# Altium PCB PCB copy2.pcbdoc
Units mm, origin at the board's own origin, x right, y up, seen from the top; angles counter-clockwise.
Board outline 151.68 x 185.92 mm, 2 copper layers (Top Layer, Bottom Layer); 79 components, 158 nets, 343 pads, 25 vias.
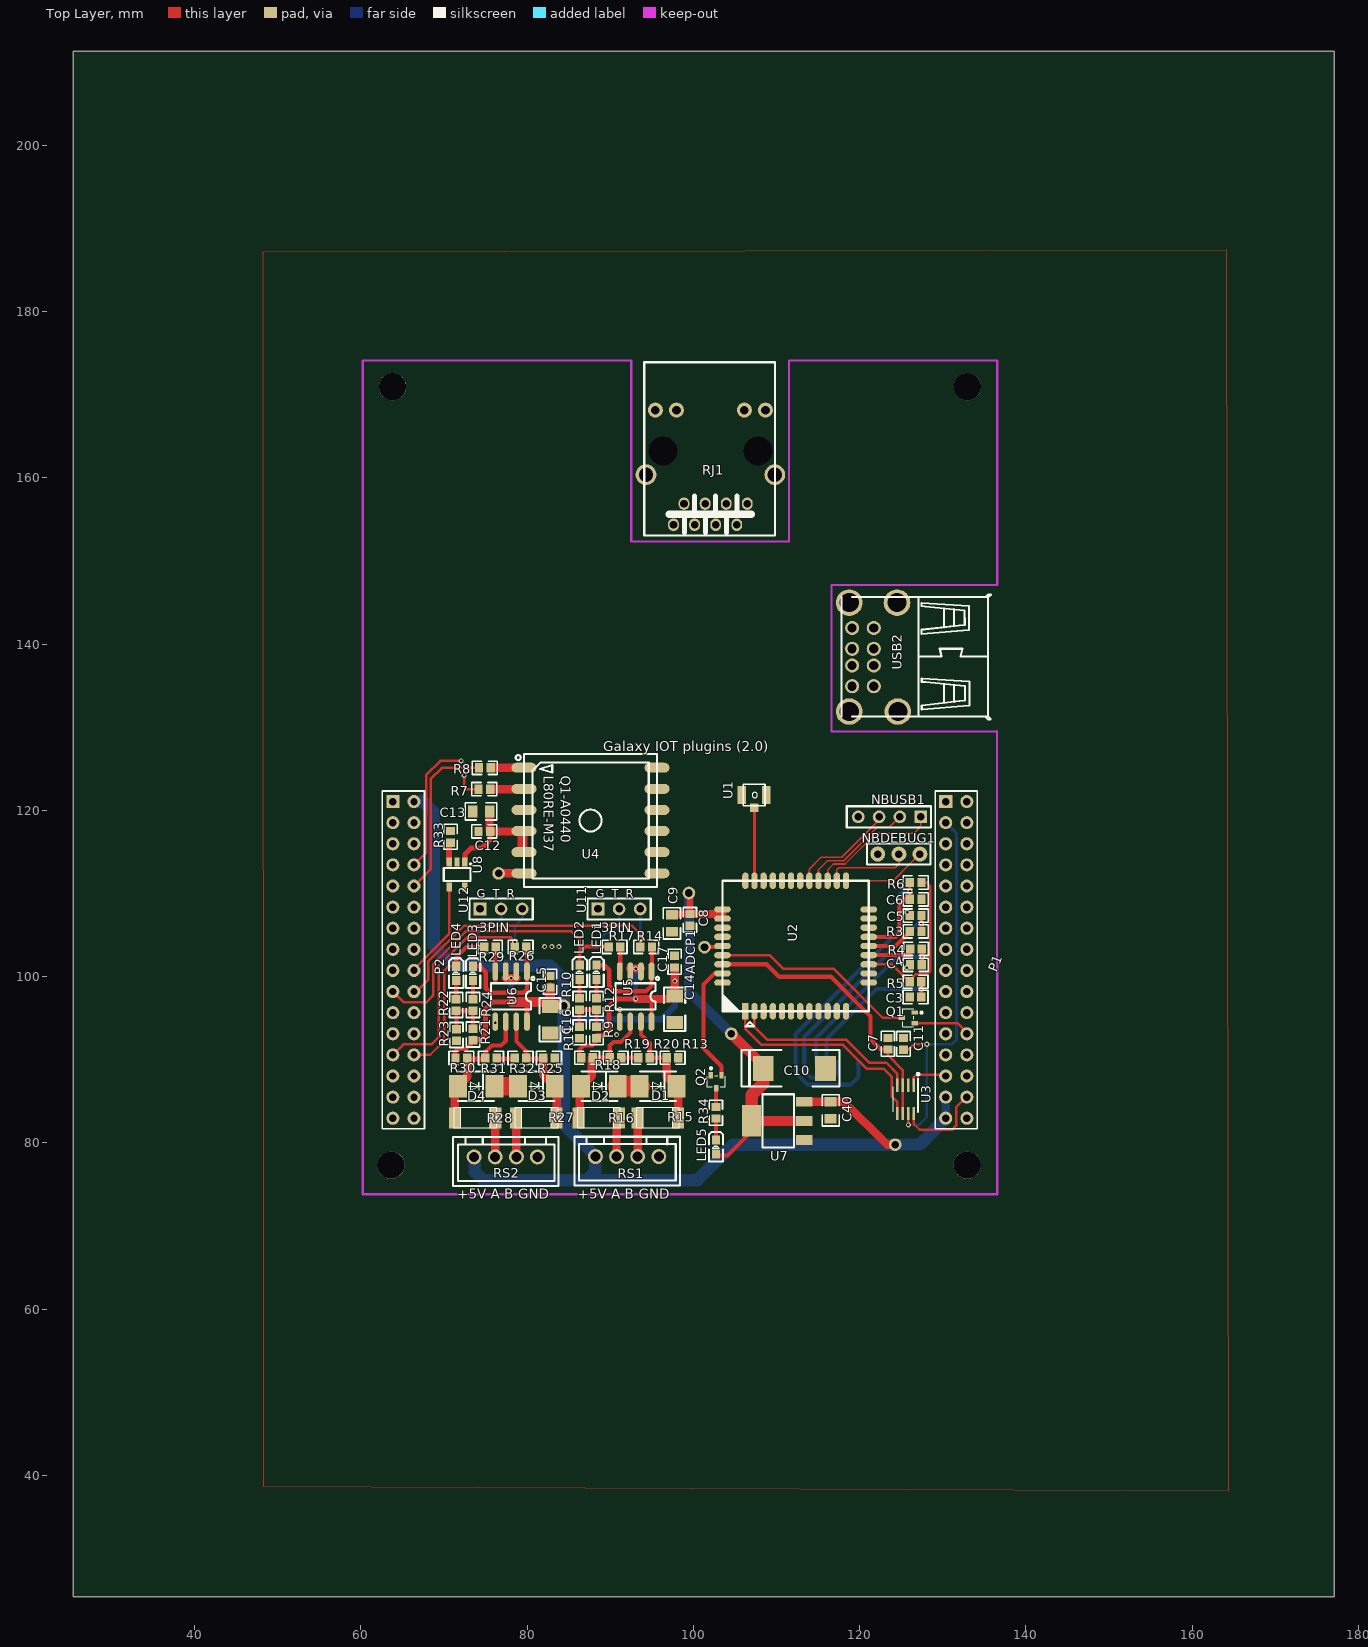
[diagram p0: Top Layer view]
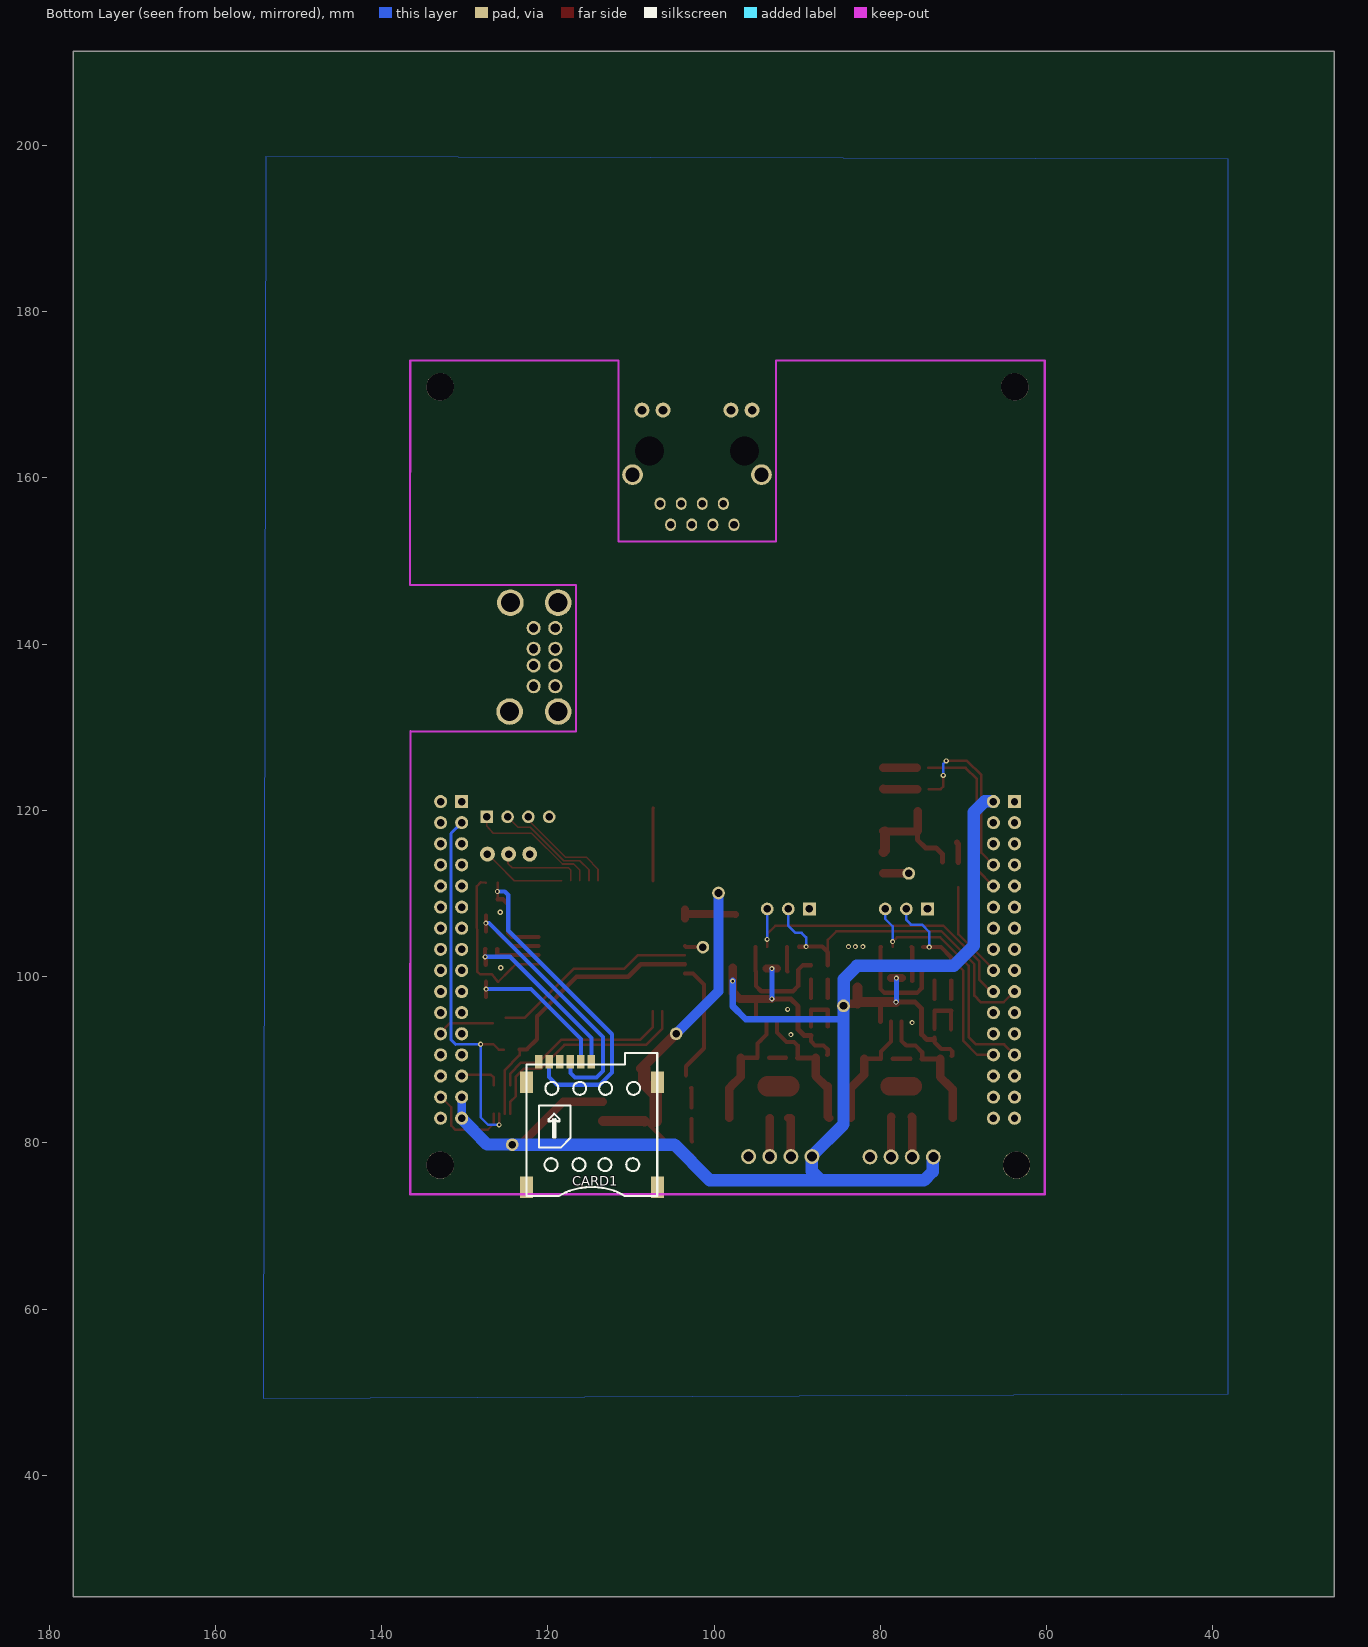
[diagram p1: Bottom Layer view, seen from below]

## Layer stack, top to bottom
Top Layer: signal copper (thickness not stored)
Dielectric: dielectric 0.32, FR-4, Dk 4.8
Bottom Layer: signal copper (thickness not stored)

## Board outline
177.08,25.4 25.4,25.4 25.4,211.32 177.08,211.32

## Components (designator, comment, footprint, x,y, rotation, side; value= is the part's Value field where it differs from the comment)
ADCP1 "1Pin" 1PIN 101.34,103.54 r0 top
C3 "33pF" 0603 126.72,97.54 r0 top
C4 "33pF" 0603 126.76,101.42 r0 top
C5 "33pF" 0603 126.74,107.34 r0 top
C6 "33pF" 0603 126.74,109.3 r180 top
C7 "100nF" 0603 123.4,91.92 r270 top
C8 "100nF" 0603 99.58,106.82 r90 top
C9 "1uF" 0805 97.42,106.42 r90 top
C10 "470uF" CASE-E_7343 112.16,88.94 r180 top
C11 "100nF" 0603 125.28,91.9 r270 top
C12 "100nF" 0603 74.841,117.467 r0 top
C13 "10uF" 0805 74.46,119.88 r0 top
C14 "10uF" 1206 97.745,96.076 r90 top
C15 "100nF" 0603 82.759,99.378 r270 top
C16 "10uF" 1206 82.759,94.806 r90 top
C17 "100nF" 0603 97.745,101.791 r270 top
C40 "10uF" 0805 116.52,83.92 r90 top
CARD1 "SIM-002-T6" 17.2MM*15.36MM*1.38MM 114.7,82.2 r0 bottom
D1 "SMBJ6.8CA" SMB(DO-214AA) 95.745,86.808 r0 top
D2 "SMBJ6.8CA" SMB(DO-214AA) 88.685,86.808 r0 top
D3 "SMBJ6.8CA" SMB(DO-214AA) 81.108,86.805 r0 top
D4 "SMBJ6.8CA" SMB(DO-214AA) 73.869,86.805 r0 top
LED1 "19-217/BHC-ZL1M2RY/3T" LED-0603 88.347,100.521 r270 top
LED2 "KT-0603R" LED-0603 86.315,100.521 r270 top
LED3 "19-217/BHC-ZL1M2RY/3T" LED-0603 73.488,100.394 r270 top
LED4 "KT-0603R" LED-0603 71.456,100.394 r270 top
LED5 "19-217/BHC-ZL1M2RY/3T" LED-0603 102.72,79.5 r270 top
NBDEBUG1 "3pin插针" 3PIN插针 127.26,114.74 r180 top
NBUSB1 "4PIN" 2.5-4PIN 127.34,119.22 r180 top
P1 "Header-Female-2.54_2x16" HDR-16X2/2.54 132.9,100.74 r270 top
P2 "Header-Female-2.54_2x16" HDR-16X2/2.54 66.38,100.74 r270 top
Q1 "DTC143XUAT106" SOT-323_3PIN_L2.10-W2.20-PITCH0.65-TR 125.84,95.04 r0 top
Q2 "DTC143XUAT106" SOT-323_3PIN_L2.10-W2.20-PITCH0.65-TR 102.74,87.36 r90 top
R3 "22" 0603 126.74,105.44 r0 top
R4 "22" 0603 126.78,103.34 r0 top
R5 "22" 0603 126.72,99.38 r0 top
R6 "10K" 0603 126.74,111.32 r0 top
R7 "100" 0603 74.841,122.547 r180 top
R8 "100" 0603 74.9,125.12 r180 top
R9 "470" 0603 88.347,93.282 r270 top
R10 "4.7K" 0603 86.315,96.711 r90 top
R11 "2K" 0603 86.315,93.282 r270 top
R12 "4.7K" 0603 88.347,96.711 r90 top
R13 "4.7K" 0603 97.491,90.234 r180 top
R14 "22" 0603 94.316,103.569 r0 top
R15 "10" 2010 95.713,82.995 r180 top
R16 "10" 2010 88.601,82.995 r0 top
R17 "22" 0603 90.506,103.569 r0 top
R18 "4.7K" 0603 87.204,90.234 r0 top
R19 "120" 0603 90.633,90.234 r180 top
R20 "NC" 0603 94.062,90.234 r0 top
R21 "470" 0603 73.488,93.028 r270 top
R22 "4.7K" 0603 71.456,96.584 r90 top
R23 "2K" 0603 71.485,92.968 r270 top
R24 "4.7K" 0603 73.488,96.584 r90 top
R25 "4.7K" 0603 82.626,90.208 r180 top
R26 "22" 0603 79.203,103.569 r0 top
R27 "10" 2010 81.108,82.995 r180 top
R28 "10" 2010 73.742,82.995 r0 top
R29 "22" 0603 75.52,103.569 r0 top
R30 "4.7K" 0603 72.085,90.208 r0 top
R31 "120" 0603 75.641,90.208 r180 top
R32 "NC" 0603 79.197,90.208 r0 top
R33 "10K" 0603 70.78,116.82 r270 top
R34 "470" 0603 102.7,83.62 r270 top
RJ1 "HR911105A" RJ45-LIGHT 102.045,161.265 r180 top
RS1 "A2501WV-04P2" A2501WV-4P 92.024,78.349 r180 top
RS2 "A2501WV-04P2" A2501WV-4P 77.425,78.308 r180 top
U1 "IPEX" IPEX座-3P-Φ2 105.981,123.14 r270 top
U2 "SIM7020C" GSM15.7X17.6-42_P1.1 112.3,103.68 r90 top
U3 "TXS0102DCTR" SSOP-8_2.95X2.8MM_PITCH0.65MM 125.52,85.22 r270 top
U4 "L80-R" L80-R 87.62,118.78 r180 top
U5 "MAX13487EESA" SOIC-8_150MIL 93.046,97.6 r270 top
U6 "MAX13487EESA" SOIC-8_150MIL 78.06,97.6 r270 top
U7 "AMS1117-3.3" SOT-223 110.18,82.64 r180 top
U8 "SY6280AAC" SOT-23-5 71.56,112.28 r270 top
U11 "3PIN" 3PIN 88.521,108.14 r90 top
U12 "3PIN" 3PIN 74.32,108.14 r90 top
USB2 "Double layer DIP 90° black" USB-M-51 121.674,138.44 r90 top

## Footprints (in the part's own frame and the unit in brackets; to place one, negate y for a bottom-side part, rotate by r counter-clockwise, add the part's x,y. Pads: shape width x height; smd on the part's side, far side on the other; paste and mask are expansions set on the pad)
1PIN [mil]
  round 60 hole 36: 1(0,0)
2.5-4PIN [mil]
  rect 60x60 hole 36: 1(0,0)
  round 60 hole 36: 2(98.4,0) 3(196.9,0) 4(295.3,0)
  silkscreen extent -50,-50 350,50
3PIN [mil]
  rect 60x60 hole 36: 1(0,0)
  round 60 hole 36: 2(0,-100) 3(0,-200)
  silkscreen extent -50,-250 50,50
3PIN插针 [mm]
  round 1.8 hole 0.9: 1(0,0) 2(2.54,0) 3(5.08,0)
  silkscreen extent -1.27,-1.27 6.35,1.27
17.2MM*15.36MM*1.38MM [mil]
  rect 61.42x102.76 smd: 7(309.49,-199.8) 8(310.6,296.97)
  rect 61.42x102.75 smd: 9(-310.61,296.72) 10(-310.35,-200.26)
  rect 35.44x63 smd: C1(201.88,-296.97) C2(101.88,-296.97) C3(1.88,-296.97) C5(251.88,-296.97) C6(151.88,-296.97) C7(51.88,-296.97)
  silkscreen extent -310,-339 309,338
0603 [mm]
  rect 1x1.1 smd: 1(-0.7,0) 2(0.7,0)
  silkscreen extent -1.5,-0.8 1.5,0.8
0805 [mm]
  rect 1.16x1.45 smd: 1(-1.016,0) 2(1.016,0)
  silkscreen extent -1.9,-1.03 1.87,1.04
1206 [mm]
  rect 1.6x2 smd: 1(-1.6,0) 2(1.6,0)
  silkscreen extent -2.61,-1.27 2.62,1.27
2010 [mil]
  rect 55.1x98.4 smd: 1(-96.5,0) 2(96.5,0)
  silkscreen extent -100,-50 100,50
A2501WV-4P [mm]
  round 1.8 hole 1.2: 1(3.809,0.001) 2(1.269,0.001) 3(-1.271,0.001) 4(-3.809,-0.001)
  silkscreen extent -6.35,-2.38 6.35,3.5
CASE-E_7343 [mil]
  rect 98.42x118.5 smd: 1(147.5,0) 2(-147.5,0)
  silkscreen extent -214,-87 252,86
GSM15.7X17.6-42_P1.1 [mm]
  rect 2x0.75 smd: 1(-7.85,6.05)
  oval 2x0.75 smd: 2(-7.85,4.95) 3(-7.85,3.85) 4(-7.85,2.75) 5(-7.85,1.65) 6(-7.85,0.55) 7(-7.85,-0.55) 8(-7.85,-1.65) 9(-7.85,-2.75) 10(-7.85,-3.85) 11(-7.85,-4.95) 12(-7.85,-6.05) 22(7.85,-6.05) 23(7.85,-4.95) 24(7.85,-3.85) 25(7.85,-2.75) 26(7.85,-1.65) 27(7.85,-0.55) 28(7.85,0.55) 29(7.85,1.65) 30(7.85,2.75) 31(7.85,3.85) 32(7.85,4.95) 33(7.85,6.05)
  oval 0.75x2 smd: 13(-4.4,-8.8) 14(-3.3,-8.8) 15(-2.2,-8.8) 16(-1.1,-8.8) 17(0,-8.8) 18(1.1,-8.8) 19(2.2,-8.8) 20(3.3,-8.8) 21(4.4,-8.8) 34(4.4,8.8) 35(3.3,8.8) 36(2.2,8.8) 37(1.1,8.8) 38(0,8.8) 39(-1.1,8.8) 40(-2.2,8.8) 41(-3.3,8.8) 42(-4.4,8.8)
  silkscreen extent -9.65,-8.8 7.85,8.8
HDR-16X2/2.54 [mil]
  rect 62x62 hole 35: 1(-800,-100)
  round 62 hole 35: 2(-800,0) 3(-700,-100) 4(-700,0) 5(-600,-100) 6(-600,0) 7(-500,-100) 8(-500,0) 9(-400,-100) 10(-400,0) 11(-300,-100) 12(-300,0) 13(-200,-100) 14(-200,0) 15(-100,-100) 16(-100,0) 17(0,-100) 18(0,0) 19(100,-100) 20(100,0) 21(200,-100) 22(200,0) 23(300,-100) 24(300,0) 25(400,-100) 26(400,0) 27(500,-100) 28(500,0) 29(600,-100) 30(600,0) 31(700,-100) 32(700,0)
  silkscreen extent -850,-150 750,50
IPEX座-3P-Φ2 [mm]
  rect 2.2x1.049 smd: 1(1.3,2.8) 2(1.3,-0.149)
  rect 1.049x1.001 smd: 3(2.83,1.33)
  silkscreen extent 0,0.03 2.6,2.63
L80-R [mm]
  oval 3x1.2 smd: 1(8,-6.35) 2(8,-3.81) 3(8,-1.27) 4(8,1.27) 5(8,3.81) 6(8,6.35) 7(-8,6.35) 8(-8,3.81) 9(-8,1.27) 10(-8,-1.27) 11(-8,-3.81) 12(-8,-6.35)
  silkscreen extent -8,-8 9,8
LED-0603 [mil]
  rect 43x39 smd: 1(33.5,0) 2(-33.5,0)
  silkscreen extent -72,-34 70,34
RJ45-LIGHT [mm]
  oval 1.3x1.499 hole 0.914 copper offset 0,0: 1(-4.445,4.355) 2(-3.175,6.895) 3(-1.905,4.355) 4(-0.635,6.895) 5(0.635,4.355) 6(1.905,6.895) 7(3.175,4.355) 8(4.445,6.895)
  round 1.8 hole 1.04: 9(-6.625,-6.895) 10(-4.085,-6.895) 11(4.085,-6.895) 12(6.625,-6.895)
  round 2.5 hole 1.702: 13(-7.75,0.875) 14(7.75,0.875)
  round 2 hole 3.5 unplated: 15(5.715,-1.995) 16(-5.715,-1.995)
  silkscreen extent -7.78,-12.65 7.96,8.18
SMB(DO-214AA) [mil]
  rect 85x108 smd: 1(-87,0) 2(87,0)
  silkscreen extent -85,-70 85,70
SOIC-8_150MIL [mm]
  oval 2.2x0.7 smd: 1(-3.023,1.905) 2(-3.023,0.635) 3(-3.023,-0.635) 4(-3.023,-1.905) 5(3.023,-1.905) 6(3.023,-0.635) 7(3.023,0.635) 8(3.023,1.905)
  silkscreen extent -2.37,-2.41 1.55,2.83
SOT-23-5 [mm]
  rect 1.062x0.65 smd: 1(-1.5,0.95) 2(-1.5,0) 3(-1.5,-0.95) 4(1.5,-0.95) 5(1.5,0.95)
  silkscreen extent -1.33,-1.6 0.8,1.71
SOT-223 [mm]
  rect 2x1.2 smd: 1(-3.175,2.3) 2(-3.175,0) 3(-3.175,-2.3)
  rect 2.3x3.8 smd: 4(3.175,0)
  silkscreen extent -1.93,-3.2 1.87,3.2
SOT-323_3PIN_L2.10-W2.20-PITCH0.65-TR [mm]
  rect 0.8x0.5 smd: 1(0.775,0.65) 2(0.775,-0.65) 3(-0.775,0)
  silkscreen extent -0.68,-1.1 1.83,1.1
SSOP-8_2.95X2.8MM_PITCH0.65MM [mm]
  rect 1.6x0.3 smd: 1(-1.7,0.975) 2(-1.7,0.325) 3(-1.7,-0.325) 4(-1.7,-0.975) 5(1.7,-0.975) 6(1.7,-0.325) 7(1.7,0.325) 8(1.7,0.975)
  silkscreen extent -3.2,-1.5 1.5,1.68
USB-M-51 [mm]
  round 3.2 hole 2.3: 0(-6.551,-2.925) 0(-6.551,2.925) 0(6.55,-2.826) 0(6.55,2.925)
  round 1.7 hole 1.1: 1(-3.5,2.574) 2(-1.001,2.574) 3(1.001,2.574) 4(3.5,2.574) 5(-3.5,-0.027) 6(-1.001,-0.027) 7(1.001,-0.027) 8(3.5,-0.027)
  silkscreen extent -7.52,-14.13 7.54,3.87

## Free pads (board coordinates)
  round 1.524 hole 0.914: 1(84.42,96.48) 4(76.561,112.415) 5(104.56,93.12) 6(99.46,110.06) 8(124.28,79.78)
  round 3.302 hole 3.302 unplated: ""(63.606,77.328) ""(63.796,170.968) ""(132.946,77.328) ""(132.966,170.968)

## Via types
v1: diameter 0.61, hole 0.305, Top Layer to Bottom Layer, 25 vias

## Nets (pads, with @x,y where several pads share a name; then routed paths per layer and width w, separated by ;. In a path a pad name is that pad's centre, name@x,y a point inside that pad or via, vN(x,y) a via of type N, cw(c..) or ccw(c..) an arc to the next point about the centre after c; other vN are vias at no path point)
3.3V: C11.2 P1.3 P2.4 U3.7 | length 46.3
  Top Layer w0.3: C11.2 125.88,91.2 126.54,91.86 v1(128.08,91.86) ; U3.7 125.86,83.505 v1(125.86,82.16)
  Bottom Layer w0.3: v1@125.859,82.161 127.16,82.16 128.08,83.08 v1(128.08,91.86)
  Bottom Layer w0.35: v1@128.081,91.859 131.081,91.841 131.64,92.4 131.64,117.241 P1.3@130.36,118.521
+5V: C14.2 C15.2 C16.2 C17.2 C40.2 P1.1 P1.29 P1.31 P2.2 pad.1 pad.8 R9.2 R18.1 R21.2 R30.1 RS1.1 RS2.1 U5.2 U5.3 U5.8 U6.2 U6.3 U6.8 U7.3 USB2.1 USB2.5 | length 213.1
  Top Layer w0.5: R30.1@71.39,90.45 71.329,90.511 71.329,90.996 71.601,91.268 72.655,91.268 73.488,92.101 R21.2@73.488,92.67 ; R18.1@86.376,90.577 86.315,90.638 86.315,91.212 86.823,91.72 87.839,91.72 88.347,92.228 R9.2@88.347,92.924 ; U5.8@94.951,94.92 94.951,97.435
  Top Layer w0.6: R21.2@73.488,92.408 74.364,92.408 75.012,93.056 75.012,96.134 75.804,96.927 v1@78.106,96.927 ; U6.8 79.99,96.928 ; R9.2@88.347,92.925 89.171,92.925 89.871,93.625 89.871,96.419 90.76,97.308 v1(93.046,97.308)
  Top Layer w1: U6.3@77.425,99.823 v1(78.06,99.823) U6.2@78.695,99.823 ; C16.2@82.759,96.749 84.487,96.749 pad.1@84.664,96.571 ; U5.3@92.411,100.966 v1(93.046,100.966) U5.2@93.681,100.966 ; v1(93.046,97.308) 96.907,97.308 C14.2@97.745,98.146 ; C14.2@97.745,98.019 97.745,99.445 v1(97.76,99.46) 97.76,101.091 C17.2 ; U7.3 116.516,84.94 C40.2 118.144,84.936 123.3,79.78 pad.8
  Top Layer w1.2: v1(78.105,96.928) 82.58,96.928 82.759,96.749 C15.2
  Bottom Layer w0.6: v1(78.06,99.823) 78.06,96.973 v1(78.105,96.928) ; v1(93.046,97.308) v1(93.046,100.966)
  Bottom Layer w0.8: pad.1@84.421,96.479 84.881,94.861 96.181,94.861 97.759,96.441 v1@97.759,99.461
  Bottom Layer w1: P1.31 P1.29
  Bottom Layer w1.5: P2.2@66.4,121.079 67.441,121.079 68.76,119.758 68.76,103.7 71.18,101.28 82.801,101.28 84.419,99.659 pad.1 ; RS2.1@73.616,78.308 73.68,78.242 73.68,76.54 74.741,75.481 87.139,75.481 ; pad.1 84.42,82.22 88.256,78.384 RS1.1@88.221,78.384 ; RS1.1@88.216,78.349 88.216,76.555 87.139,75.481 ; pad.8@124.279,79.781 104.779,79.781 100.52,75.519 87.177,75.519 87.139,75.481 ; pad.8@124.279,79.799 127.296,79.799 P1.31
CARD1_C2: C5.2 CARD1.C2 R3.2 | length 31.6
  Top Layer w0.5: R3.2 v1(127.44,106.44) C5.2
  Bottom Layer w0.5: CARD1.C2@117.289,89.743 117.281,88.399 116.74,87.861 114.139,87.861 113.339,88.641 113.339,92.72 127.059,106.44 v1(127.44,106.44)
CARD1_C3: C4.2 CARD1.C3 R4.2 | length 21.7
  Top Layer w0.5: C4.2 127.46,102.3 v1(127.54,102.38) 127.54,103.34 R4.2
  Bottom Layer w0.5: CARD1.C3@114.749,89.743 114.749,92.608 124.521,102.38 v1(127.54,102.38)
CARD1_C6: CARD1.C6
CARD1_C7: C3.2 CARD1.C7 R5.2 | length 18.5
  Top Layer w0.5: C3.2 v1(127.42,98.5) R5.2
  Bottom Layer w0.5: CARD1.C7@116.019,89.743 116.019,92.499 122.02,98.5 v1(127.42,98.5)
GND: C3.1 C4.1 C5.1 C6.1 C7.1 C8.1 C9.1 C10.2 C11.1 C12.1 C13.1 C14.1 C15.1 C16.1 C17.1 C40.1 CARD1.7 CARD1.8 CARD1.9 CARD1.10 CARD1.C5 D1.1 D2.2 D3.1 D4.2 NBDEBUG1.3 NBUSB1.4 P1.2 P1.4 P1.32 P2.1 P2.31 Q1.1 Q2.1 R11.2 R13.1 R23.2 R25.1 R33.1 RJ1.8 RJ1.13 RJ1.14 RS1.4 RS2.4 U1.1 U1.2 U2.8 U2.13 U2.19 U2.21 U2.27 U2.30 U2.31 U2.33 U2.36 U2.37 U3.2 U4.3 U4.12 U5.5 U6.5 U7.1 U8.2 U11.1 U12.1 USB2.0 USB2.4 USB2.8 | length 5.4
  Top Layer w2.2: D4.2 D3.1
  Top Layer w2.5: D2.2@90.938,86.805 D1.1@93.503,86.805
  other v1: 90.76,93.028 76.155,94.45 91.141,96.051 125.66,101.06 82.1,103.6 82.98,103.6 83.82,103.6 125.72,107.74
GPS1PPS: pad.4 U4.6 | length 3.1
  Top Layer w1: pad.4 76.576,112.43 U4.6
GPS3.3V: C12.2 C13.2 U4.4 U4.5 U8.1 | length 14.8
  Top Layer w0.6: U8.1@72.511,113.779 72.511,114.729 73.26,115.481 74.541,115.481 75.541,116.482 C12.2
  Top Layer w1: C13.2 75.476,117.532 75.541,117.467 79.577,117.467 U4.4
  Top Layer w1.2: U4.4@79.414,117.467 79.414,115.176 U4.5
GPSEN: P2.18 U8.4 | length 12
  Top Layer w0.3: P2.18@66.4,100.759 66.26,100.759 70.614,105.113 U8.4@70.614,110.779
LINK_LED: RJ1.12
NB3.3V: C8.2 C9.2 C10.1 LED5.1 pad.5 pad.6 U2.34 U2.35 U7.2 U7.4 | length 56.2
  Top Layer w0.5: LED5.1@102.641,78.481 104.119,78.481 108.323,82.679 110.06,82.679
  Top Layer w0.8: C9.2 97.42,107.52 C8.2 99.58,109.94 pad.6
  Top Layer w1: C8.2 103.499,107.52 ; U2.35 U2.34
  Top Layer w1.2: pad.5@104.561,93.119 108.759,88.94 C10.1@108.414,88.94 ; 108.385,82.58 108.385,82.64 U7.2
  Top Layer w1.5: U7.4 107.005,85.785 107.48,86.26 108.413,87.194 C10.1
  Bottom Layer w1.2: pad.6 99.46,98.22 99.48,98.2 pad.5
NB_RXD: U2.2 U3.4 | length 22.8
  Top Layer w0.3: U2.2 107.35,93.929 108.902,92.379 118.406,92.379 121.142,89.639 123.202,89.639 124.546,88.295 U3.4@124.546,86.921
NB_TXD: U2.1 U3.5 | length 26.8
  Top Layer w0.3: U2.1 106.25,93.71 108.18,91.78 118,91.78 120.88,88.9 122.922,88.9 123.839,87.978 123.839,85.6 124.546,84.894 U3.5@124.546,83.52
NB_USB_DM: NBUSB1.3 U2.26 | length 13.2
  Top Layer w0.2: U2.26@113.951,111.531 113.951,112.9 115.328,114.34 117.86,114.34 122.74,119.22 NBUSB1.3
NB_USB_DP: NBUSB1.2 U2.25 | length 13.7
  Top Layer w0.2: U2.25@115.051,111.531 115.051,112.852 116.138,113.939 118.079,113.939 122.1,117.96 123.58,117.96 NBUSB1.2
NB_USB_VBUS: NBUSB1.1 U2.24 | length 15.8
  Top Layer w0.2: U2.24@116.151,111.531 116.151,112.832 116.862,113.543 118.239,113.54 121.96,117.259 126.555,117.259 127.34,118.11 NBUSB1.1
NBPWREN: P1.24 Q1.2 | length 6.9
  Top Layer w0.3: Q1.2@126.616,94.391 131.762,94.399 P1.24@132.981,93.18
NETLIGHT: Q2.2 U2.41 | length 14.6
  Top Layer w0.5: Q2.2 103.39,89.21 101.221,91.379 101.221,99.06 102.539,100.38 U2.41
OTH3.3V: U8.5
PA0: P2.9
PA1: P2.12
PA2: P2.11
PA3: P2.14
PA4: P2.13
PA5: P2.16
PA6: P2.15
PA8: P2.17
PA11: P2.22
PA12: P2.21
PB0: P2.32
PB1: P1.26
PB3: P1.23
PB5: P1.25
PB7: P1.28
PB13: P1.10
PD8: P1.21
PD9: P1.22
PD10: P1.19
PD11: P1.20
PD12: P1.17
PD13: P1.18
PD14: P1.15
PD15: P1.16
PF7: P1.8
PF8: P1.7
PF9: P1.6
PF10: P1.5
PG0: P2.29
PG1: P2.30
PG3: P2.27
PG5: P2.28
PG6: P2.25 R26.1 U12.3 | length 31.3
  Top Layer w0.3: P2.25@63.86,90.599 65.102,91.841 68.493,91.841 69.359,92.707 69.359,101.3 72.78,104.719 78,104.719 v1@78.5,104.221 ; R26.1@78.5,103.571 v1(78.5,104.22) 78.503,104.217 R26.1 R26.1@78.5,103.571
  Bottom Layer w0.3: v1(78.5,104.22) 78.5,106.04 79.4,106.94 U12.3
PG7: LED4.2 P2.26 R29.1 U12.2 | length 26.6
  Top Layer w0.3: P2.26@66.4,90.599 68.34,90.599 69.999,92.255 69.999,100.701 70.545,101.244 LED4.2@71.457,101.244 ; v1(74.1,103.54) 74.129,103.569 R29.1
  Top Layer w0.5: LED4.2 71.456,102.299 72.697,103.54 v1(74.1,103.54) 74.791,103.54 R29.1
  Bottom Layer w0.3: v1(74.1,103.54) 74.1,105.381 74.98,106.261 76.301,106.261 76.86,106.819 U12.2
PG8: P2.23
PG9: P2.24
PG11: P1.13
PG12: P1.14
PG13: P1.11
PG14: P1.12
PG15: P1.9
PWRKEY: Q1.3 U2.39 | length 24.7
  Top Layer w0.3: U2.39 109.158,102.58 110.819,100.919 116.9,100.919 122.78,95.039 Q1.3
R10_2: LED2.1 R10.2 | length 2.3
  Top Layer w0.5: R10.2 LED2.1
R12_1: R9.1 R10.1 R11.1 R12.1 | length 6.1
  Top Layer w0.5: R11.1 R10.1 R12.1 R9.1
R12_2: LED1.1 R12.2 | length 2.3
  Top Layer w0.5: R12.2 LED1.1
R19_1: R19.1 R20.1 | length 2
  Top Layer w0.5: R19.1 R20.1
R22_2: LED4.1 R22.2 | length 2.3
  Top Layer w0.5: R22.2 LED4.1
R24_1: R21.1 R22.1 R23.1 R24.1 | length 6.4
  Top Layer w0.5: R23.1 71.485,95.855 R22.1 R24.1 R21.1
R24_2: LED3.1 R24.2 | length 2.3
  Top Layer w0.5: R24.2 LED3.1
R31_1: R31.1 R32.1 | length 2.2
  Top Layer w0.5: R31.1@76.347,90.107 R32.1@78.503,90.107
R34_1: Q2.3 R34.1 | length 2.3
  Top Layer w0.5: R34.1@102.72,84.26 102.72,86.565 Q2.3
R34_2: LED5.2 R34.2 | length 2.7
  Top Layer w0.5: LED5.2@102.64,80.171 102.72,80.251 R34.2@102.72,82.86
RF_ANT: U1.3 U2.32 | length 8.8
  Top Layer w0.36: U1.3 107.35,120.27 U2.32
RJ1_4: RJ1.4 RJ1.5
RJ1_7: RJ1.7
RJ1_10: RJ1.10
RJ1_11: RJ1.11
RS1_2: R16.2 RS1.2 | length 4.9
  Top Layer w1: RS1.2@90.756,78.347 90.761,82.995 R16.2
RS1_3: R15.2 RS1.3 | length 4.7
  Top Layer w1: R15.2 93.301,82.995 RS1.3@93.296,78.347
RS2_2: R28.2 RS2.2 | length 4.8
  Top Layer w1: RS2.2@76.155,78.288 76.165,83.084 R28.2@76.193,83.122
RS2_3: R27.2 RS2.3 | length 4.9
  Top Layer w1: R27.2@78.657,83.122 78.696,83.083 RS2.3@78.696,78.287
RXN: RJ1.6
RXP: RJ1.3
S$18: 
S$19: 
S$20: 
S$21: 
S$23: 
S$24: 
S$26: 
S$28: 
S$30: 
S$67: 
S$69: 
S$81: 
S$83: 
S$85: 
S$87: 
S$92: 
S$96: 
S$589: 
S$591: 
S$2331: 
SIM_CLK: R4.1 U2.16 | length 5.7
  Top Layer w0.5: U2.16 126.079,102.58 ; 126.08,102.58 R4.1
SIM_DATA: R5.1 R6.2 U2.15 | length 20.4
  Top Layer w0.3: U2.15 123.86,101.48 124.56,100.78 125.96,99.38 R5.1 ; R5.1 126.74,100.279 128.152,100.279 128.498,100.619 128.521,110.871 128.043,111.366 R6.2@127.441,111.32
SIM_RST: R3.1 U2.17 | length 5.7
  Top Layer w0.5: U2.17 124.319,103.68 126.039,105.4 R3.1
SIM_UART2_RXD: NBDEBUG1.2 U2.23 | length 10.3
  Top Layer w0.2: U2.23@117.251,111.531 117.251,112.829 117.5,113.08 124.279,113.08 124.779,113.581 124.779,114.681 NBDEBUG1.2@124.721,114.739
SIM_UART2_TXD: NBDEBUG1.1 U2.22 | length 10.2
  Top Layer w0.2: U2.22 124.029,111.53 126.097,113.599 127.182,114.66 NBDEBUG1.1@127.261,114.739
SIM_VDD: C6.2 CARD1.C1 R6.1 U2.18 | length 49.3
  Top Layer w0.3: C6.2 126.04,110.22 126.06,110.24 126.04,110.26 R6.1
  Top Layer w0.5: U2.18 124.299,104.78 124.779,105.26 124.779,108.699 125.381,109.301 C6.2@126.039,109.301
  Bottom Layer w0.5: CARD1.C1@119.829,89.743 119.859,88.58 119.859,87.919 118.899,86.979 113.781,86.979 112.28,88.481 112.28,93.06 124.76,105.538 124.76,109.82 125.179,110.24 v1(126.06,110.24)
SPEED_LED: RJ1.9
STATUSEN: U2.42
TXN: RJ1.2
TXP: RJ1.1
U2_3: U2.3
U2_4: U2.4
U2_5: U2.5
U2_6: U2.6
U2_7: U2.7
U2_9: U2.9
U2_10: U2.10
U2_11: U2.11
U2_12: U2.12
U2_14: U2.14
U2_20: U2.20
U2_28: U2.28
U2_29: U2.29
U2_38: ADCP1.1 U2.38 | length 2.2
  Top Layer w0.5: ADCP1.1 103.36,103.54 U2.38
U4_1: R8.1 U4.1 | length 4
  Top Layer w1: R8.1 79.61,125.12 U4.1
U4_2: R7.1 U4.2 | length 4.1
  Top Layer w1: R7.1 79.577,122.547 U4.2
U4_7: U4.7
U4_8: U4.8
U4_9: U4.9
U4_10: U4.10
U4_11: U4.11
U5_1: LED1.2 R14.2 U5.1 | length 14
  Top Layer w0.5: LED1.2 89.274,101.372 89.871,100.775 89.871,98.87 90.506,98.235 94.316,98.235 94.951,98.87 U5.1 95.016,100.688 R14.2
U5_4: R17.2 U5.4 | length 3
  Top Layer w0.5: U5.4 91.206,100.688 R17.2
U5_6: D2.1 R16.1 R18.2 R19.2 U5.6 | length 16.1
  Top Layer w0.5: R19.2 89.933,91.693 90.379,92.139 91.268,92.139 92.411,93.282 U5.6
  Top Layer w0.6: R18.2@87.777,90.234 R19.2
  Top Layer w1: R16.1 86.315,83.16 86.315,86.805 86.518,86.805 87.777,88.064 R18.2@87.777,90.234
U5_7: D1.2 R13.2 R15.1 R20.2 U5.7 | length 14.6
  Top Layer w0.5: U5.7 93.681,93.409 93.681,93.028 94.443,92.266 94.57,92.139 94.762,91.947 R20.2 R13.2
  Top Layer w1: R13.2 96.791,87.937 D1.2 ; D1.2@97.923,86.805 98.164,86.564 R15.1
U6_1: LED3.2 R26.2 U6.1 | length 14.2
  Top Layer w0.5: LED3.2 74.288,101.245 75.012,100.521 75.012,98.601 75.566,98.047 79.485,98.047 79.965,98.527 79.965,99.48 79.965,103.569 R26.2
U6_4: R29.2 U6.4 | length 4.1
  Top Layer w0.5: 76.155,99.48 76.155,100.902 76.155,103.504 R29.2
U6_6: D4.1 R28.1 R30.2 R31.2 U6.6 | length 16
  Top Layer w0.5: R31.2@74.946,90.107 74.946,90.889 75.764,91.707 76.866,91.707 77.425,92.268 U6.6
  Top Layer w0.6: R30.2@72.791,90.107 R31.2@74.947,90.107
  Top Layer w1: R28.1 71.291,86.437 D4.1 72.791,87.937 R30.2@72.791,90.107
U6_7: D3.2 R25.2 R27.1 R32.2 U6.7 | length 14.8
  Top Layer w0.5: U6.7 78.695,92.177 79.904,90.968 R32.2@79.904,90.107 ; R32.2@79.903,90.107 R25.2@81.932,90.107
  Top Layer w1: R25.2@81.932,90.107 81.932,88.191 D3.2 83.559,86.564 R27.1
U8_3: R33.2 U8.3 | length 2.4
  Top Layer w0.7: U8.3 70.61,115.95 R33.2
UART2_RXD: P2.20 R14.1 U11.3 | length 38.8
  Top Layer w0.3: P2.20@66.4,98.219 66.4,97.919 68.079,99.601 68.079,101.798 72.402,106.121 92.62,106.121 93.62,105.121 v1(93.62,104.48) ; v1(93.62,104.48) 93.62,103.572 R14.1 93.616,104.476 v1(93.62,104.48)
  Bottom Layer w0.3: U11.3@93.6,108.14 93.6,105.592 93.62,105.572 v1(93.62,104.48)
UART2_TXD: LED2.2 P2.19 R17.1 U11.2 | length 42.1
  Top Layer w0.3: P2.19@63.86,98.219 65.14,96.939 67.919,96.939 68.681,97.701 68.681,101.488 72.638,105.46 85.28,105.46 86.316,104.424 86.316,102.682
  Top Layer w0.5: LED2.2 86.315,102.934 86.981,103.6 v1(88.92,103.6) ; v1(88.92,103.6) R17.1@89.773,103.599
  Bottom Layer w0.3: v1(88.92,103.6) 88.92,104.719 89.461,105.26 90.22,105.26 91.06,106.1 U11.2@91.06,108.14
UART8_RXD: P1.30 U3.8 | length 10.9
  Top Layer w0.3: U3.8@126.494,83.525 126.499,82.298 127.23,81.569 131.099,81.559 131.619,82.077 131.619,84.279 P1.30@132.9,85.56
UART8_TXD: P1.27 U3.1 | length 5
  Top Layer w0.3: U3.1@126.494,86.921 126.494,87.835 126.88,88.219 130.241,88.219 P1.27@130.36,88.1
UART9_RXD: P2.8 R7.2 | length 21.4
  Top Layer w0.3: P2.8@66.4,113.46 67.84,114.9 67.84,116.319 67.84,124.239 69.562,125.961 v1(72.062,125.961) ; v1(72.42,124.2) 72.44,124.18 72.44,122.84 72.733,122.547 R7.2
  Bottom Layer w0.3: v1(72.062,125.961) 72.42,125.602 v1(72.42,124.2)
UART9_TXD: P2.10 R8.2 | length 20
  Top Layer w0.3: P2.10@66.4,110.92 68.381,112.901 68.381,114.5 68.381,123.759 69.74,125.12 R8.2
USB0_DM: P2.6
USB0_DM_E: USB2.2
USB0_DP: P2.3
USB0_DP_E: USB2.3
USB1_DM: P2.7
USB1_DM_E: USB2.6
USB1_DP: P2.5
USB1_DP_E: USB2.7
VDD_EXT: C7.2 U2.40 U3.3 U3.6 | length 34.2
  Top Layer w0.3: C7.2@123.4,91.221 123.4,90.561 125.201,88.709 U3.3@125.196,86.921 ; U3.6 U3.3
  Top Layer w0.5: U2.40 108.818,101.48 110.319,99.979 116.539,99.979 121.299,95.219 121.299,92.461 122.539,91.219 C7.2
pads on no net: RJ1.15 RJ1.16

## Polygon pours and split planes (outlines as drawn)
GND on Bottom Layer (solid): 38.14,198.36 153.96,198.62 154.22,49.26 38.14,49.78 38.1,198.32
GND on Top Layer (solid): 48.3,187.2 164.12,187.46 164.38,38.1 48.3,38.62 48.26,187.16

## Silkscreen, mask and mechanical layers (free items; w line width, h text height)
Top Overlay:
  text "Galaxy IOT plugins (2.0)" at 89.181,127.108 h1.2
  text "G  T  R" at 88.279,109.494 h1
  text "G  T  R" at 73.919,109.474 h1
  text "+5V A B GND" at 86.066,73.26 h1.2
  text "+5V A B GND" at 71.58,73.24 h1.2

## Text inside footprints (layer, text, board x,y; h text height)
U4: Top Overlay "L80RE-M37" at 82.011,124.179 h1.2 r270; Top Overlay "Q1-A0440" at 84.02,124.18 h1.2 r270
U11: Top Overlay "1" at 88.14,106.235 h0.76 r270
U12: Top Overlay "1" at 73.939,106.235 h0.76 r270